# Altium PCB evacc_v3_1.PcbDoc (part 1 of 5)
Units mm, origin at the board's own origin, x right, y up, seen from the top; angles counter-clockwise.
Board outline 160 x 215 mm, 2 copper layers (Top Layer, Bottom Layer), stack 1.671 mm thick; 227 components, 143 nets, 622 pads, 320 vias.
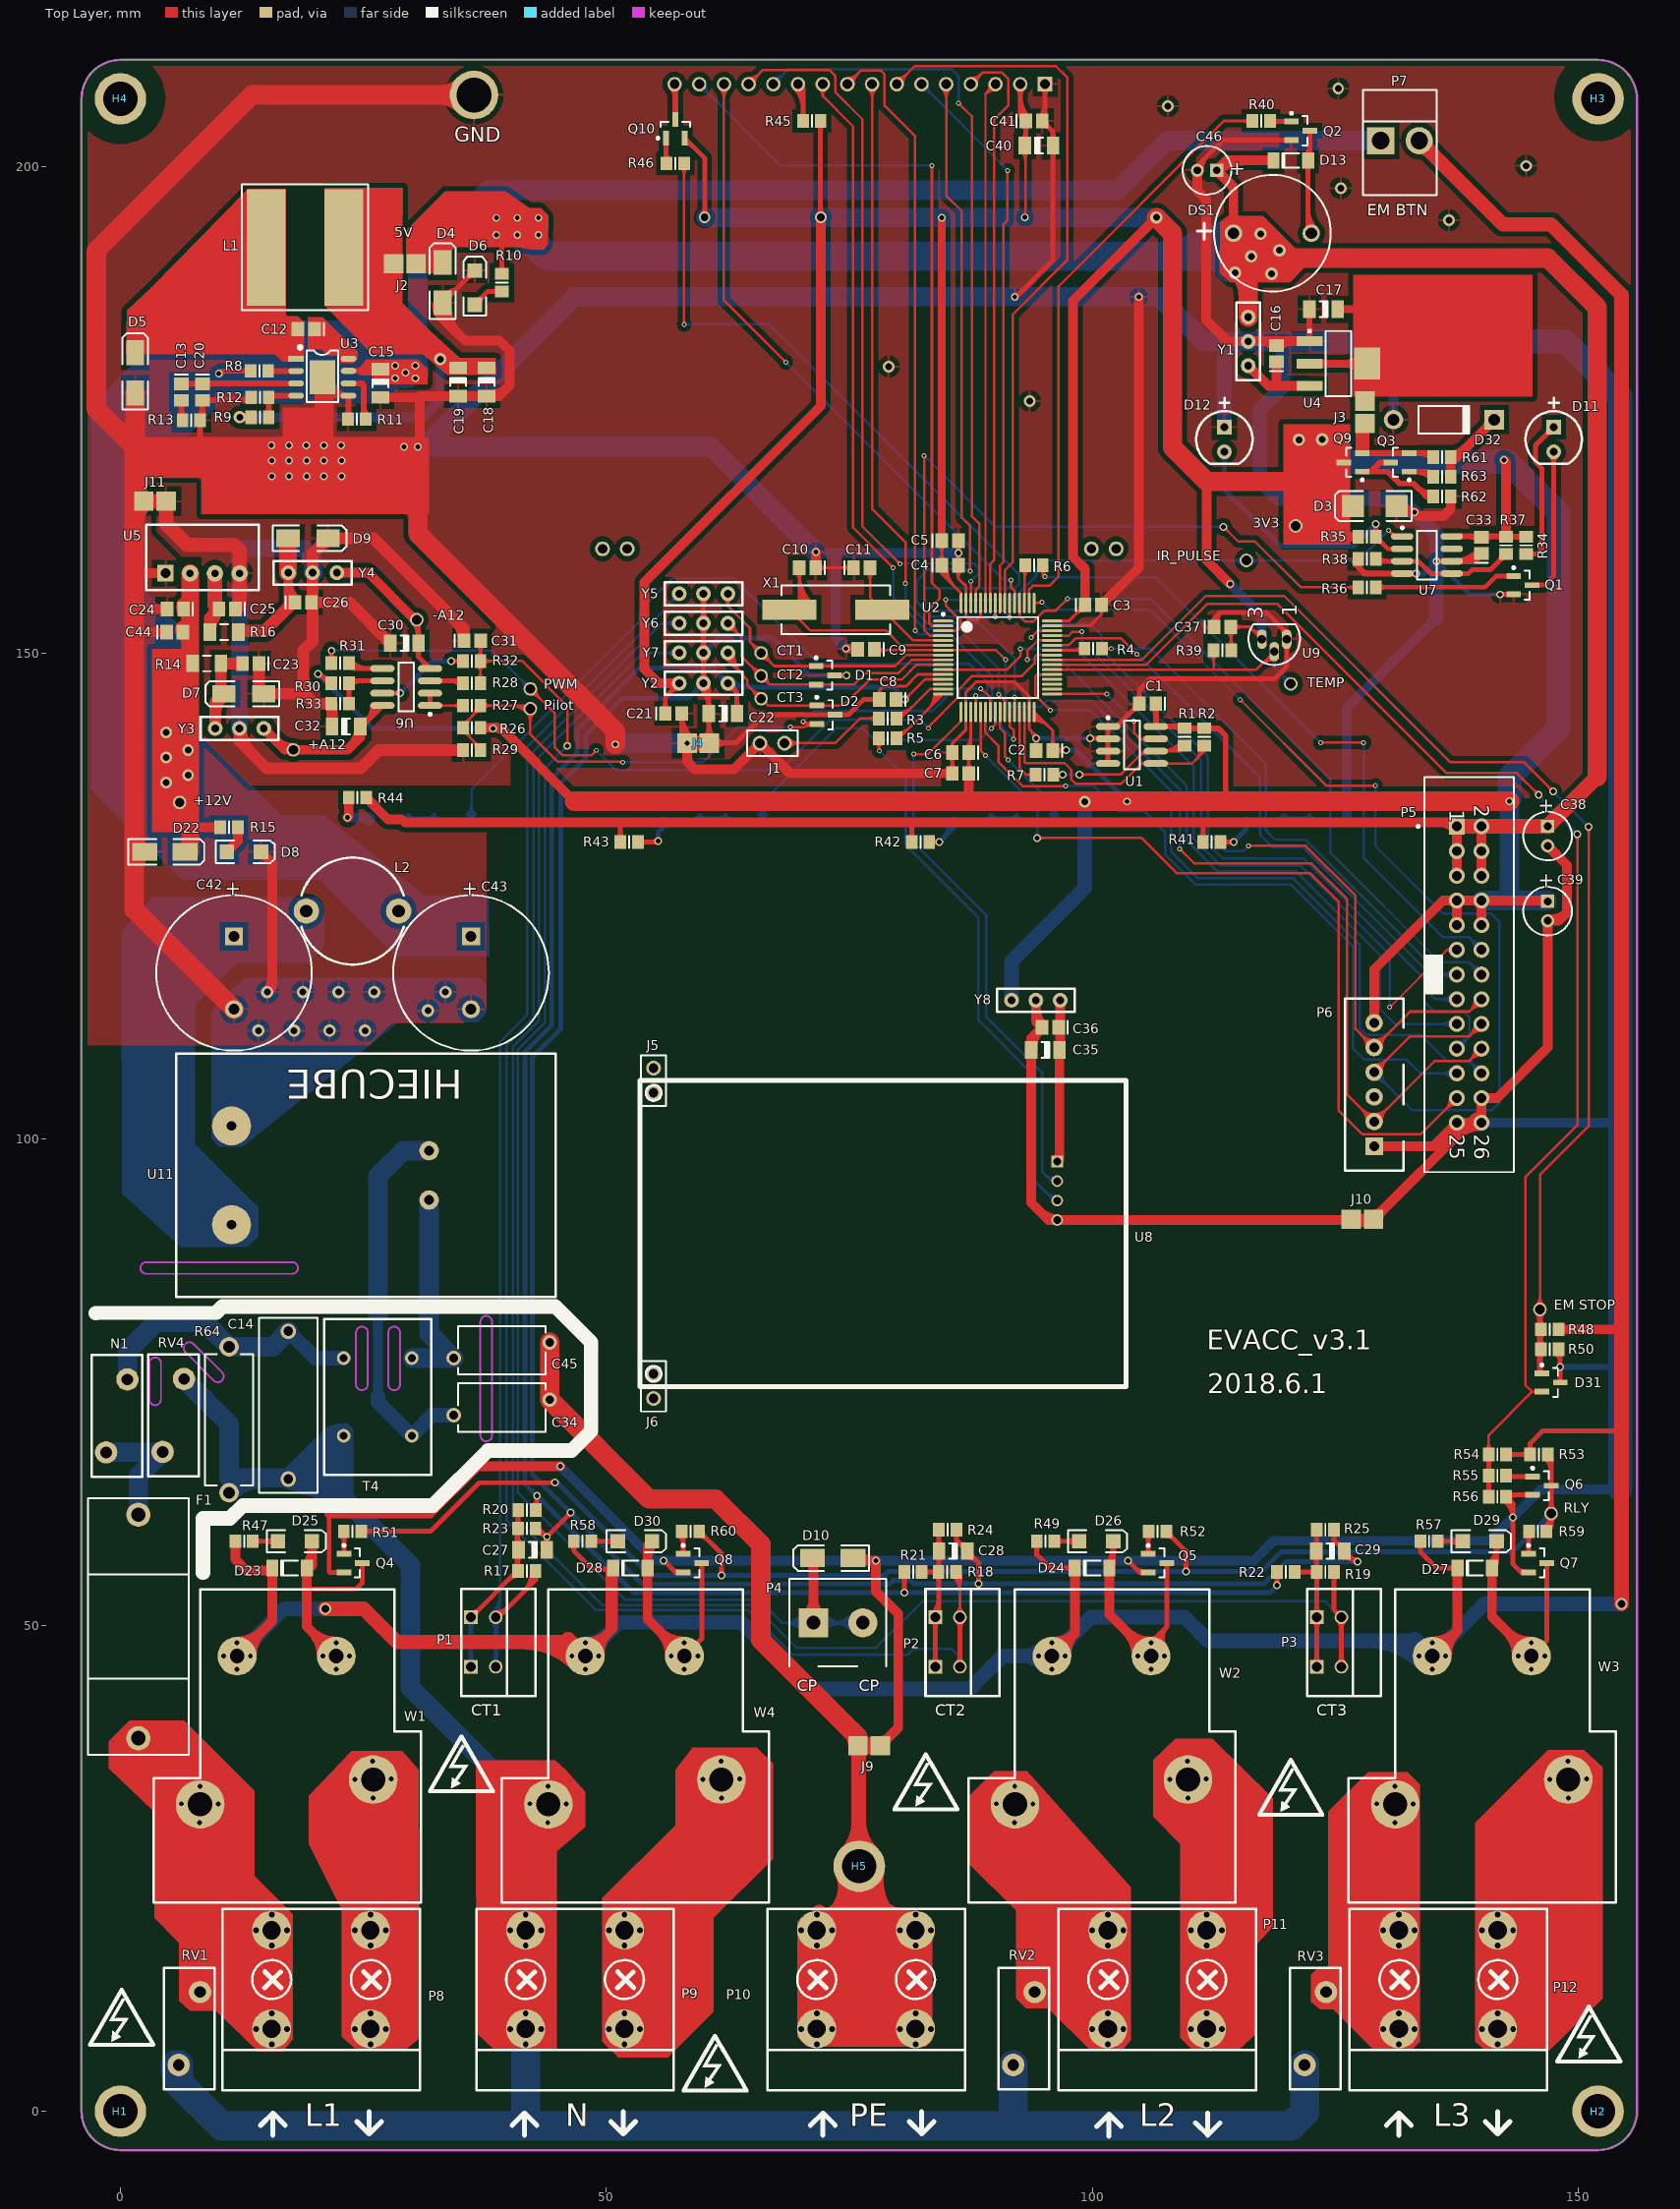
[diagram p0: Top Layer view]
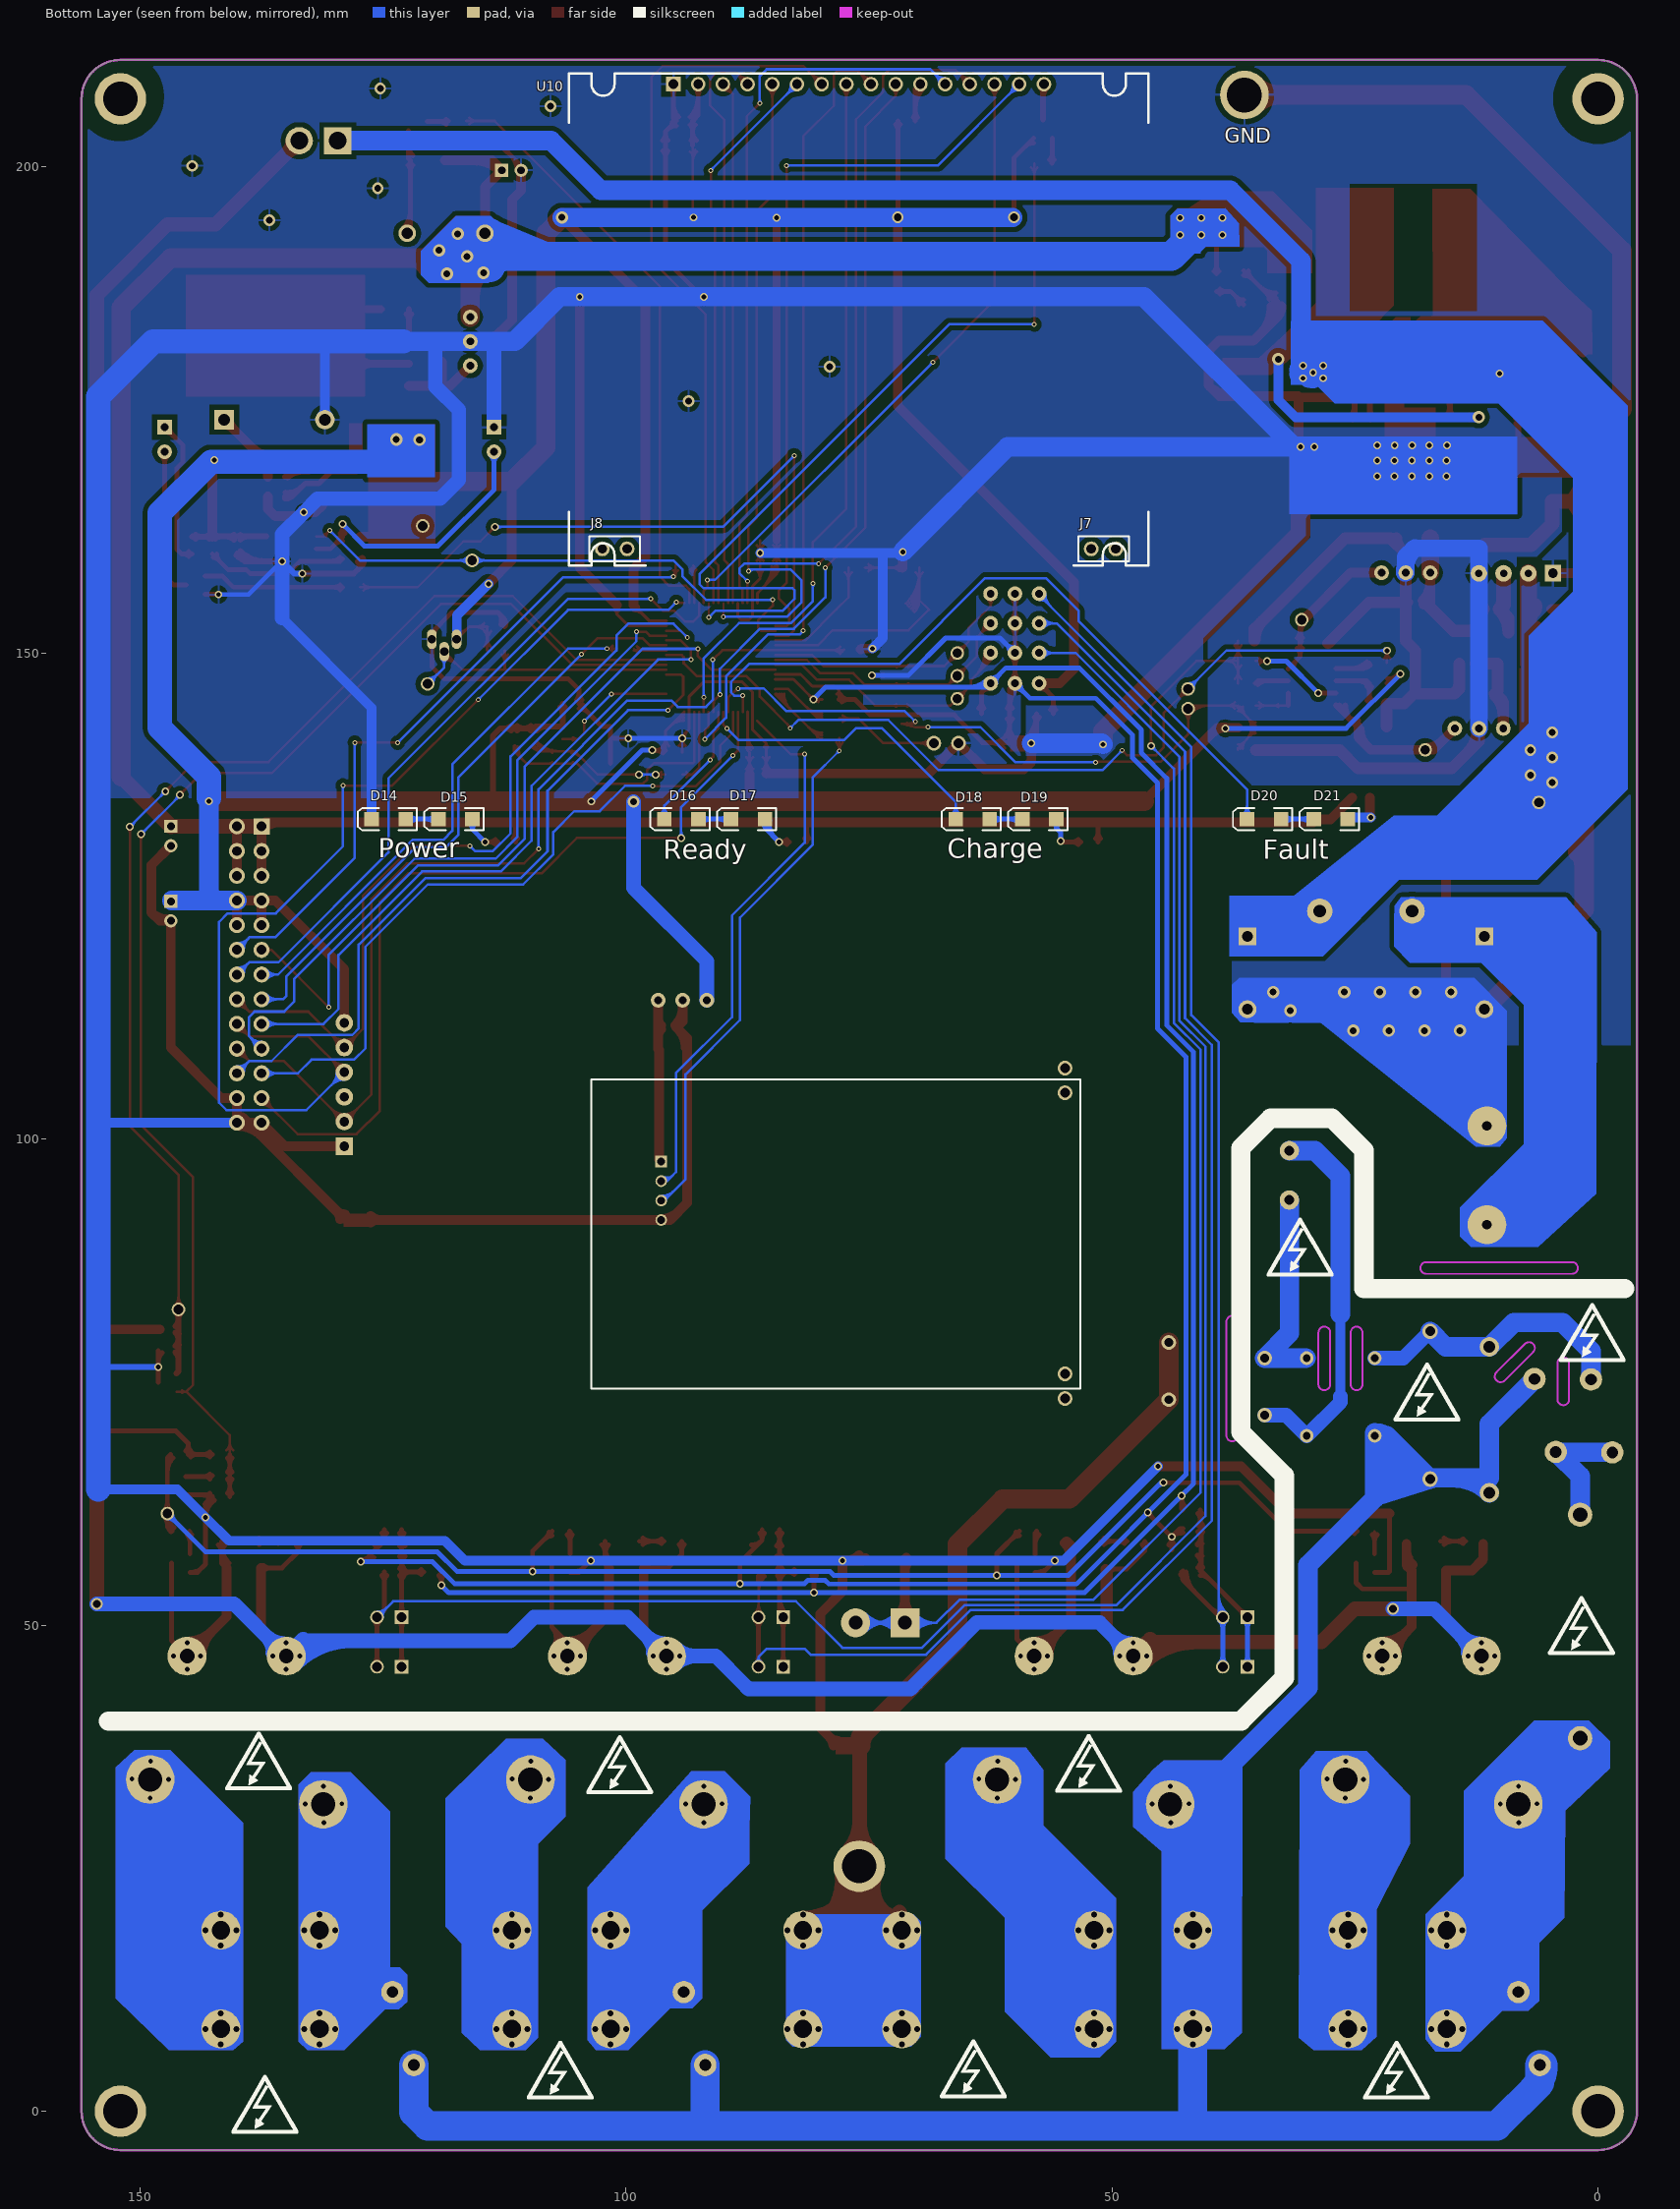
[diagram p1: Bottom Layer view, seen from below]

## Layer stack, top to bottom
Top Layer: signal copper 0.0356
Dielectric: core 1.6, FR-4, Dk 4.8
Bottom Layer: signal copper 0.0356

## Board outline
-4.002,0 ccw(c0,0) 0,-4.002 0,-4 152,-4 152,-4.002 ccw(c152,0) 156.002,0 155.999,0 155.999,207 156.002,207 ccw(c152,207) 152,211.002 0,211.002 ccw(c0,207) -4.002,207 -4,207

## Design rules (kind name [scope] priority, off if disabled: settings)
Clearance Clearance_Region [InPolygon and InNetClass('Power')] p1: gap=0.52
Clearance Clearance_All [All] p2: gap=0.2
Height [All] p1: minheight=0 maxheight=30 prefheight=25.4
HoleSize [All] p1: absolutevalues=TRUE maxlimit=6 minlimit=0.3 maxpercent=80.000 minpercent=20.000
MinimumSolderMaskSliver [All] p1: minsoldermaskwidth=0
PolygonConnect [All] p1: connectstyle=Relief reliefconductorwidth=0.254 reliefentries=4 polygonreliefangle="90 Angle"
RoomDefinition U_TempSensor [InComponentClass('U_TempSensor')] p1: confinementstyle=ConfineOut formatcopy=TRUE lockcomponents=TRUE outline 160.973,210.365 188.151,210.365 188.151,224.208 160.973,224.208
RoomDefinition U_Sockets [InComponentClass('U_Sockets')] p2: confinementstyle=ConfineOut formatcopy=TRUE lockcomponents=TRUE outline -49.085,146.382 -18.986,146.382 -18.986,159.844 -49.085,159.844
RoomDefinition U_RFID [InComponentClass('U_RFID')] p3: confinementstyle=ConfineOut formatcopy=TRUE lockcomponents=TRUE outline -48.45,76.253 -17.97,76.253 -17.97,90.604 -48.45,90.604
RoomDefinition U_Relays [InComponentClass('U_Relays')] p4: confinementstyle=ConfineOut formatcopy=TRUE lockcomponents=TRUE outline -48.958,94.185 -17.589,94.185 -17.589,109.298 -48.958,109.298
RoomDefinition U_Power2 [InComponentClass('U_Power2')] p5: confinementstyle=ConfineOut formatcopy=TRUE lockcomponents=TRUE outline -48.704,213.667 -18.986,213.667 -18.986,226.621 -48.704,226.621
RoomDefinition U_Power1 [InComponentClass('U_Power1')] p6: confinementstyle=ConfineOut formatcopy=TRUE lockcomponents=TRUE outline -48.704,195.531 -18.478,195.531 -18.478,209.755 -48.704,209.755
RoomDefinition U_Pilot [InComponentClass('U_Pilot')] p7: confinementstyle=ConfineOut formatcopy=TRUE lockcomponents=TRUE outline -48.958,111.33 -17.589,111.33 -17.589,127.332 -48.958,127.332
RoomDefinition U_MCU [InComponentClass('U_MCU')] p8: confinementstyle=ConfineOut formatcopy=TRUE lockcomponents=TRUE outline 160.866,178.361 188.659,178.361 188.659,191.696 160.866,191.696
RoomDefinition U_LCD_Direct [InComponentClass('U_LCD_Direct')] p9: confinementstyle=ConfineOut formatcopy=TRUE lockcomponents=TRUE outline -49.085,129.618 -18.351,129.618 -18.351,144.096 -49.085,144.096
RoomDefinition U_IR_BEAT [InComponentClass('U_IR_BEAT')] p10: confinementstyle=ConfineOut formatcopy=TRUE lockcomponents=TRUE outline 162.116,119.941 190.945,119.941 190.945,141.023 162.116,141.023
RoomDefinition U_EEP [InComponentClass('U_EEP')] p11: confinementstyle=ConfineOut formatcopy=TRUE lockcomponents=TRUE outline 160.719,193.88 184.341,193.88 184.341,203.024 160.719,203.024
RoomDefinition U_CT [InComponentClass('U_CT')] p12: confinementstyle=ConfineOut formatcopy=TRUE lockcomponents=TRUE outline 160.846,162.74 188.786,162.74 188.786,177.218 160.846,177.218
RoomDefinition U_Buzzor [InComponentClass('U_Buzzor')] p13: confinementstyle=ConfineOut formatcopy=TRUE lockcomponents=TRUE outline 160.973,143.69 188.786,143.69 188.786,160.073 160.973,160.073
RoomDefinition U_AC_DC [InComponentClass('U_AC_DC')] p14: confinementstyle=ConfineOut formatcopy=TRUE lockcomponents=TRUE outline -49.085,161.876 -16.827,161.876 -16.827,177.116 -49.085,177.116
RoomDefinition layout [InComponentClass('layout')] p15: confinementstyle=ConfineOut formatcopy=TRUE lockcomponents=TRUE outline -49.085,178.132 -16.573,178.132 -16.573,194.007 -49.085,194.007
RoutingVias [All] p1: holewidth=0.3 width=0.5 viastyle="Through Hole" minholewidth=0.3 minwidth=0.5 maxholewidth=0.711 maxwidth=1.27
SilkToSilkClearance [All] p1: silktosilkclearance=0.01
SilkscreenOverComponentPads [All] p1: minsilkscreentomaskgap=0.01
SolderMaskExpansion [All] p1: expansion=0.102
TestPointUsage [All] p1: valid=0 allowmultiple=FALSE
Testpoint [All] p1: side=15 testpointundercomponent=TRUE minsize=1.016 maxsize=2.54 preferedsize=1.524 minholesize=0 maxholesize=1.016 preferedholesize=0.813 testpointgrid=0.025 style=1023 order=0-112345678
Width [All] p1: maxlimit=5 minlimit=0.2 preferedwidth=0.254
19 further rules are at their usual default settings.

## Classes and differential pairs
component class layout: H1 H2 H3 H4 H5
component class U_Buzzor: C46 D13 DS1 Q2 R40
component class U_CT: C27 C28 C29 CT1 CT2 CT3 FL5 FL6 FL7 P1 P2 P3 R17 R18 R19 R20 R21 R22 R23 R24 R25 Y5 Y6 Y7
component class U_EEP: C1 R1 R2 U1
component class U_IR_BEAT: C33 D11 D12 IR_PULSE IR_PULSE1 Q1 R34 R35 R36 R37 R38 U7
component class U_LCD_Direct: C40 C41 D14 D15 D16 D17 D18 D19 D20 D21 J7 J8 Q10 R41 R42 R43 R44 R45 R46 U10
component class U_MCU: C2 C3 C4 C5 C6 C7 C8 C9 C10 C11 D1 D2 J1 R3 R4 R5 R6 R7 U2 X1
component class U_Pilot: C30 C31 C32 D10 P4 Pilot Pilot1 PWM PWM1 R26 R27 R28 R29 R30 R31 R32 R33 U6
component class U_Power1: +A1 +A12 -1 -A12 C23 C24 C25 C26 D7 D8 D9 FL3 FL4 J11 R14 R15 R16 U5 Y3 Y4
component class U_Power2: 3V3 C12 C13 C15 C16 C17 C18 C19 C20 C21 C22 D3 D4 D5 D6 D32 FL1 FL2 J2 J3 J4 L1 Q3 Q9 R8 R9 R10 R11 R12 R13 R61 R62 R63 U3 U4 Y1 Y2
component class U_RFID: C35 C36 J5 J6 J10 U8 Y8
component class U_Sockets: C38 C39 P5 P6
component class U_TempSensor: C37 R39 TEMP TEMP1 U9
component class U_AC_DC: +12V C14 C34 C42 C43 C44 C45 D22 F1 L2 N1 R64 RV4 T4 U11
component class U_Relays: D23 D24 D25 D26 D27 D28 D29 D30 D31 EM1 "EM STOP" J9 P7 P8 P9 P10 P11 P12 Q4 Q5 Q6 Q7 Q8 R47 R48 R49 R50 R51 R52 R53 R54 R55 R56 R57 R58 R59 R60 RLY RLY1 RV1 RV2 RV3 W1 W2 W3 W4
net class Power: +3V3 +5V +12V +A3V3 +A12V -A12V AGND EM12V GND GND-A12V

## Components (designator, comment, footprint, x,y, rotation, side; value= is the part's Value field where it differs from the comment)
3V3 "TP1.4/1.0" TP1.4/1.0 120.904,163.068 r90 top
+12V "TP1.4/1.0" TP1.4/1.0 6.096,134.62 r90 top (schematic designator 12V)
+A12 "TP1.4/1.0" TP1.4/1.0 17.78,140.03 r0 top
-A12 "TP1.4/1.0" TP1.4/1.0 30.48,153.416 r180 top
C1 "100nF 50V" CAPC2012N 105.664,144.78 r180 top
C2 "100nF 50V" CAPC2012N 95.06,139.967 r180 top
C3 "100nF 50V" CAPC2012N 100.076,154.94 r0 top
C4 "100nF 50V" CAPC2012N 85.344,159.004 r0 top
C5 "4.7uF 16V" CAPC2012N 85.344,161.544 r0 top
C6 "100nF 50V" CAPC2012N 86.424,139.764 r180 top
C7 "1uF 16V" CAPC2012N 86.424,137.605 r180 top
C8 "100nF 50V" CAPC2012N 78.931,145.225 r180 top
C9 "100nF 50V" CAPC2012N 76.708,150.368 r180 top
C10 "18pF 50V NP0" CAPC2012N 70.676,158.763 r180 top
C11 "18pF 50V NP0" CAPC2012N 76.264,158.763 r0 top
C12 "100nF 50V" CAPC2012N 19.114,183.314 r180 top
C13 "150pF 50V NP0" CAPC2012N 6.287,176.837 r270 top
C14 "0.1uF 275VAC MKP" "0.1uF 275VAC MKP" 17.272,72.624 r90 top
C15 "10uF 16V X7R" CAPC3216N 26.734,177.737 r270 top
C16 "4.7uF 16V" CAPC2012N 118.936,180.785 r90 top
C17 "10uF 16V X7R" CAPC3216N 123.762,185.346 r180 top
C18 "10uF 16V X7R" CAPC3216N 37.656,177.864 r270 top
C19 "10uF 16V X7R" CAPC3216N 34.735,177.864 r270 top
C20 "NC" CAPC2012N 8.446,176.837 r270 top
C21 "1uF 16V" CAPC2012N 56.896,143.764 r0 top
C22 "10uF 16V X7R" CAPC3216N 61.976,143.764 r180 top
C23 "100nF 50V" CAPC2012N 13.411,148.92 r180 top
C24 "4.7uF 16V" CAPC2012N 5.652,154.51 r180 top
C25 "4.7uF 16V" CAPC2012N 10.986,154.51 r180 top
C26 "100nF 50V" CAPC2012N 18.796,155.194 r0 top
C27 "10uF 16V X7R" CAPC3216N 42.406,57.736 r180 top
C28 "10uF 16V X7R" CAPC3216N 85.662,57.609 r180 top
C29 "10uF 16V X7R" CAPC3216N 124.46,57.609 r180 top
C30 "10uF 16V X7R" CAPC3216N 29.21,151.003 r180 top
C31 "270pF 50V NP0" CAPC2012N 36.195,151.257 r0 top
C32 "10uF 16V X7R" CAPC3216N 23.216,142.418 r0 top
C33 "100nF 50V" CAPC2012N 139.993,161.064 r90 top
C34 "222M 250VAC P10" CAPRD10-9x5 39.226,72.39 r0 top
C35 "10uF 16V X7R" CAPC3216N 95.148,109.169 r180 top
C36 "100nF 50V" CAPC2012N 95.656,111.481 r180 top
C37 "100nF 50V" CAPC2012N 113.36,152.679 r0 top
C38 "100uF 16V low ESR" CAPPR2-5x11 146.812,131.166 r270 top
C39 "100uF 16V low ESR" CAPPR2-5x11 146.812,123.444 r270 top
C40 "10uF 16V X7R" CAPC3216N 94.488,202.184 r0 top
C41 "100nF 50V X7R" CAPC2012N 93.98,204.724 r0 top
C42 "2200uF 25V low ESR" CAPPR7.5-16x25 11.684,117.094 r270 top locked
C43 "2200uF 25V low ESR" CAPPR7.5-16x25 36.068,117.094 r270 top locked
C44 "100nF 50V" CAPC2012N 5.588,152.146 r0 top
C45 "222M 250VAC P10" CAPRD10-9x5 39.226,78.27 r180 top
C46 "100uF 16V low ESR" CAPPR2-5x11 111.776,199.644 r180 top
CT1 "TP1.4/1.0" TP1.4/1.0 65.913,149.987 r180 top
CT2 "TP1.4/1.0" TP1.4/1.0 65.913,147.637 r90 top
CT3 "TP1.4/1.0" TP1.4/1.0 65.913,145.288 r270 top
D1 "MMBZ5V6ALT1G" SOT23-3N 72.517,147.701 r0 top
D2 "MMBZ5V6ALT1G" SOT23-3N 72.583,143.637 r0 top
D3 "SMBJ3.3A" DSO-C2/X2.3 129.032,165.1 r180 top
D4 "SMAJ5.0A" DSO-C2/G1.6 33.147,188.087 r90 top
D5 "B340A-13-F" DSO-C2/G1.6 1.524,178.816 r90 top
D6 "LED2" 3.2X1.6X1.1 36.449,187.579 r90 top
D7 "1SMA5927BT3G" DSO-C2/X1.8 12.7,145.796 r180 top
D8 "LED2" 3.2X1.6X1.1 12.7,129.54 r0 top
D9 "1SMA5927BT3G" DSO-C2/X1.8 19.304,161.798 r0 top
D10 "SMAJ13CA" DSO-C2/G1.6 73.279,56.896 r180 top
D11 "IR333/H0" LED5.08/2.54-2 147.447,171.958 r180 top
D12 "PT334-6B" LED5.08/2.54-2 113.563,171.958 r180 top
D13 "LL4148" MELF-D3513-1405 120.396,200.66 r180 top
D14 "LED2" 3.2X1.6X1.1 124.397,132.906 r0 bottom locked
D15 "LED2" 3.2X1.6X1.1 117.539,132.906 r0 bottom locked
D16 "LED2" 3.2X1.6X1.1 94.298,132.906 r0 bottom locked
D17 "LED2" 3.2X1.6X1.1 87.44,132.906 r0 bottom locked
D18 "LED2" 3.2X1.6X1.1 64.326,132.906 r0 bottom locked
D19 "LED2" 3.2X1.6X1.1 57.468,132.906 r0 bottom locked
D20 "LED2" 3.2X1.6X1.1 34.354,132.906 r0 bottom locked
D21 "LED2" 3.2X1.6X1.1 27.496,132.906 r0 bottom locked
D22 "SMAJ13A" DSO-C2/G1.6 4.572,129.54 r0 top
D23 "LL4148" MELF-D3513-1405 17.399,55.88 r180 top
D24 "LL4148" MELF-D3513-1405 99.949,55.88 r180 top
D25 "LED2" 3.2X1.6X1.1 17.951,58.625 r0 top
D26 "LED2" 3.2X1.6X1.1 100.374,58.625 r0 top
D27 "LL4148" MELF-D3513-1405 139.319,55.88 r180 top
D28 "LL4148" MELF-D3513-1405 52.451,55.88 r180 top
D29 "LED2" 3.2X1.6X1.1 139.827,58.625 r0 top
D30 "LED2" 3.2X1.6X1.1 52.927,58.625 r0 top
D31 "MMBZ5V6ALT1G" SOT23-3N 147.168,74.955 r0 top
D32 "1N4729A" DIO10.36-5.2x2.8 136.144,173.99 r0 top
DS1 "B12A05" BZ12/10mm 118.502,193.167 r0 top
"EM STOP" "TP1.4/1.0" TP1.4/1.0 146.025,82.474 r0 top (schematic designator EM)
F1 "2A 250V" FUSE-CASE-23mm 1.842,49.862 r90 top
H1 "M3.0" SCREW_HOLE_3.5#1 0,15 r0 top locked
H2 "M3.0" SCREW_HOLE_3.5#1 152,15 r0 top locked
H3 "M3.0" SCREW_HOLE_3.5#2 152,207 r0 top locked
H4 "M3.0" SCREW_HOLE_3.5#2 0,207 r0 top locked
H5 "M3.0" SCREW_HOLE_3.5#3 76,29.268 r0 top locked
IR_PULSE "IR PULSE" TP1.4/1.0 115.824,159.512 r90 top
J1 "P2.54-2" JP2-P2.54 67.056,140.716 r180 top
J2 "JUMPER1X2" JP-SOLDER-H1X2-3X2 29.274,190.045 r0 top
J3 "JUMPER1X2" JP-SOLDER-H1X2-3X2 128.016,174.752 r270 top
J4 "JUMPER1X2" JP-SOLDER-H1X2-3X2 59.436,140.716 r0 top
J5 "P2.54-2" JP2-P2.54 54.839,106.02 r90 top
J6 "P2.54-2" JP2-P2.54 54.839,74.574 r270 top
J7 "P2.54-2" JP2-P2.54 50.864,160.708 r0 bottom
J8 "P2.54-2" JP2-P2.54 101.156,160.708 r0 bottom
J9 "JUMPER1X2" JP-SOLDER-H1X2-3X2 77.013,37.592 r180 top
J10 "JUMPER1X2" JP-SOLDER-H1X2-3X2 127.762,91.745 r0 top
J11 "JUMPER1X2" JP-SOLDER-H1X2-3X2 3.556,165.608 r180 top
L1 "15uH 12x12" IN-12.2X12.2MM 18.987,191.707 r0 top
L2 "5uH" Inductor9.5-11x21 23.876,123.444 r0 top locked
N1 "NTC-10D11" 10D431K -1.473,67.767 r90 top
P1 "KF141V-2P" KF141V-2P 35.077,42.672 r0 top
P2 "KF141V-2P" KF141V-2P 82.829,42.672 r0 top
P3 "KF141V-2P" KF141V-2P 122.072,42.672 r0 top
P4 "KF128-5.08-2P" KF128-5.08-2P 71.291,50.243 r0 top
P5 "IDC2.54-V26D" IDC2.54-V26D 138.748,116.918 r270 top locked
P6 "XH2.54-6" REAL_SIP6_2.54 128.969,105.601 r90 top
P7 "CON2-3.96" CON2/3.96mm 129.644,202.692 r0 top
P8 "KF135-2-10.16" KF135-2-10.16 20.638,13.54 r0 top locked
P9 "KF135-2-10.16" KF135-2-10.16 46.768,13.54 r0 top locked
P10 "KF135-2-10.16" KF135-2-10.16 76.709,13.54 r0 top locked
P11 "KF135-2-10.16" KF135-2-10.16 106.649,13.54 r0 top locked
P12 "KF135-2-10.16" KF135-2-10.16 136.589,13.54 r0 top locked
Pilot "TP1.4/1.0" TP1.4/1.0 42.164,144.272 r90 top
PWM "TP1.4/1.0" TP1.4/1.0 42.164,146.304 r0 top
Q1 "MMBT2222ALT1" SOT23-3N 144.272,156.972 r0 top
Q2 "MMBT2222ALT1" SOT23-3N 121.412,203.708 r0 top
Q3 "MMBT2907ALT" SOT23-3N 131.623,169.596 r180 top
Q4 "MMBT2222ALT1" SOT23-3N 23.942,56.388 r0 top
Q5 "MMBT2222ALT1" SOT23-3N 106.68,56.388 r0 top
Q6 "MMBT2222ALT1" SOT23-3N 146.221,64.34 r0 top
Q7 "MMBT2222ALT1" SOT23-3N 145.796,56.388 r0 top
Q8 "MMBT2222ALT1" SOT23-3N 58.845,56.388 r0 top
Q9 "FDN360P" SOT23-3N 126.797,169.596 r180 top
Q10 "MMBT2907ALT" SOT23-3N 57.087,203.913 r90 top
R1 "4k22 1%" RESC2012N 109.474,141.351 r90 top
R2 "4k22 1%" RESC2012N 111.506,141.351 r90 top
R3 "100R 5%" RESC2012N 78.931,143.256 r180 top
R4 "27R 5%" RESC2012N 100.076,150.444 r180 top
R5 "27R 5%" RESC2012N 78.931,141.224 r0 top
R6 "27R 5%" RESC2012N 93.98,159.004 r0 top
R7 "27R 5%" RESC2012N 95.06,137.478 r180 top
R8 "100k 1%" RESC2012N 14.288,179.007 r180 top
R9 "210k 1%" RESC2012N 14.351,174.244 r0 top
R10 "4k22 1%" RESC2012N 39.243,188.087 r90 top
R11 "100k 1%" RESC2012N 24.321,174.054 r0 top
R12 "40k2 1%" RESC2012N 14.351,176.276 r180 top
R13 "100k 1%" RESC2012N 7.303,173.916 r180 top
R14 "27R" RESC3216N 8.89,148.92 r0 top
R15 "4k22 1%" RESC2012N 11.176,132.08 r0 top
R16 "27R" RESC3216N 10.668,152.146 r0 top
R17 "50R 1%" RESC2012N 41.806,55.577 r0 top
R18 "50R 1%" RESC2012N 85.062,55.45 r0 top
R19 "50R 1%" RESC2012N 123.952,55.45 r0 top
R20 "10k 1%" RESC2012N 41.834,61.849 r0 top
R21 "10k 1%" RESC2012N 81.534,55.45 r180 top
R22 "10k 1%" RESC2012N 119.888,55.45 r180 top
R23 "10k 1%" RESC2012N 41.806,59.944 r180 top
R24 "10k 1%" RESC2012N 85.09,59.817 r180 top
R25 "10k 1%" RESC2012N 123.952,59.817 r180 top
R26 "2k94 1%" RESC2012N 36.131,142.303 r0 top
R27 "15k 1%" RESC2012N 36.131,144.589 r0 top
R28 "1k 1%" RESC2012N 36.131,146.875 r0 top
R29 "4k22 1%" RESC2012N 36.131,140.017 r0 top
R30 "15k 1%" RESC2012N 22.606,146.875 r0 top
R31 "15k 1%" RESC2012N 22.606,148.971 r0 top
R32 "1k 1%" RESC2012N 36.131,149.161 r0 top
R33 "15k 1%" RESC2012N 22.606,144.78 r180 top
R34 "100R" RESC2012N 144.602,161.064 r90 top
R35 "470k 1%" RESC2012N 128.245,161.95 r180 top
R36 "1k 1%" RESC2012N 128.245,156.743 r0 top
R37 "10k 1%" RESC2012N 142.533,161.064 r270 top
R38 "10k 1%" RESC2012N 128.245,159.69 r0 top
R39 "3k3 1%" RESC2012N 113.36,150.266 r0 top
R40 "1k 1%" RESC2012N 117.348,204.724 r180 top
R41 "330R 5%" RESC2012N 112.268,130.556 r0 top
R42 "330R 5%" RESC2012N 82.296,130.556 r0 top
R43 "330R 5%" RESC2012N 52.324,130.556 r0 top
R44 "330R 5%" RESC2012N 24.384,135.128 r180 top
R45 "10k 1%" RESC2012N 71.12,204.724 r0 top
R46 "1k 1%" RESC2012N 57.087,200.357 r180 top
R47 "10k 1%" RESC2012N 12.719,58.625 r180 top
R48 "10k 1%" RESC2012N 147.041,80.416 r0 top
R49 "10k 1%" RESC2012N 95.167,58.625 r180 top
R50 "2k94 1%" RESC2012N 147.041,78.384 r0 top
R51 "1k 1%" RESC2012N 23.876,59.641 r0 top
R52 "1k 1%" RESC2012N 106.68,59.641 r0 top
R53 "2k94 1%" RESC2012N 145.923,67.564 r0 top
R54 "4k22 1%" RESC2012N 141.649,67.564 r0 top
R55 "1k 1%" RESC2012N 141.649,65.389 r0 top
R56 "2k94 1%" RESC2012N 141.649,63.213 r0 top
R57 "10k 1%" RESC2012N 134.62,58.625 r180 top
R58 "10k 1%" RESC2012N 47.542,58.625 r180 top
R59 "1k 1%" RESC2012N 145.796,59.641 r0 top
R60 "1k 1%" RESC2012N 58.642,59.641 r0 top
R61 "100 1%" RESC2012N 135.941,170.155 r180 top
R62 "4k7 1%" RESC2012N 135.941,166.091 r180 top
R63 "1k 1%" RESC2012N 135.941,168.123 r0 top
R64 "1M 1W" RES15-13.5X5 11.176,71.12 r270 top
RLY "TP1.4/1.0" TP1.4/1.0 147.171,61.468 r90 top
RV1 "10D431K" 10D431K 8.192,12.256 r270 top
RV2 "10D431K" 10D431K 94.044,12.256 r270 top
RV3 "10D431K" 10D431K 124.016,12.256 r270 top
RV4 "10D431K" 10D431K 4.343,67.818 r90 top
T4 "UU9.8/UF9.8 20mH" UU9.8/UF9.8 26.472,73.47 r0 top
TEMP "TP1.4/1.0" TP1.4/1.0 120.396,146.812 r90 top
U1 "M24C64-WMN6" SO8_M 104.05,140.526 r0 top
U2 "STM32F105RB" TQFP64_M 90.234,149.532 r0 top locked
U3 "MP1584" SOIC8E 20.765,178.361 r0 top
U4 "LD1117S33CTR" SOT223-4M 125.286,179.758 r0 top
U5 "B1212S-1W" B0505S-W1 4.636,158.193 r0 top
U6 "LM7332MA" D008_M 29.4,146.494 r180 top
U7 "LM293D" SOP8_M 134.405,160.073 r0 top
U8 "M1 module" RFID_MOD 103.458,106.049 r180 top
U9 "DS18B20" "TO92 variant" 118.694,151.409 r90 top
U10 "LM6029ACW" LM6029A 105.855,209.603 r180 bottom locked
U11 "HA12N20-2539" HIECUBE_AC_DC_24W 31.75,98.806 r180 top locked
W1 "HF165FD-G/12-HY1" HF165FD-G/12-HY1 12.002,46.814 r180 top locked
W2 "HF165FD-G/12-HY1" HF165FD-G/12-HY1 95.822,46.814 r180 top locked
W3 "HF165FD-G/12-HY1" HF165FD-G/12-HY1 134.938,46.814 r180 top locked
W4 "HF165FD-G/12-HY1" HF165FD-G/12-HY1 47.816,46.814 r180 top locked
X1 "25MHz" ATSM-49 73.597,154.445 r0 top
Y1 "DSS6NZ82A103" DSS6 116.015,182.044 r270 top
Y2 "DSS6NZ82A103" DSS6 59.983,146.876 r0 top
Y3 "DSS6NZ82A103" DSS6 12.243,142.24 r0 top
Y4 "DSS6NZ82A103" DSS6 19.772,158.242 r180 top
Y5 "DSS6NZ82A103" DSS6 59.983,156.096 r0 top
Y6 "DSS6NZ82A103" DSS6 59.983,153.048 r0 top
Y7 "DSS6NZ82A103" DSS6 59.983,150 r0 top
Y8 "DSS6NZ82A103" DSS6 94.172,114.275 r0 top

## Footprints (in the part's own frame and the unit in brackets; to place one, negate y for a bottom-side part, rotate by r counter-clockwise, add the part's x,y. Pads: shape width x height; smd on the part's side, far side on the other; paste and mask are expansions set on the pad)
"0.1uF 275VAC MKP" [mm] "MKP Capactor 18x6"
  round 1.6 hole 1: 1(-7.6,0) 2(7.6,0)
  silkscreen extent -9,-3 9,3
3.2X1.6X1.1 [mm] "SMT LED; 2 Flat Leads"
  rect 1.5x1.5 smd: 1(-1.75,0) 2(1.75,0)
  silkscreen extent -2.9,-1.15 3.2,1.15
10D431K [mm] "Varistor 275VAC dia.12.5 P7.5"
  round 2.3 hole 1.2: 1(0,0) 2(7.5,-2.2)
  silkscreen extent -2.5,-3.7 10,1.5
ATSM-49 [mm]
  rect 5.55x2.05 smd: 1(-4.775,0) 2(4.775,0)
  silkscreen extent -5.6,-2.5 5.6,2.5, body extent -5.6,-2.51 5.6,2.51, height 4
B0505S-W1 [mm] "DC-DC converter for RS485"
  rect 1.7x1.7 hole 1: 1(0,0)
  round 1.7 hole 0.762: 2(2.54,0) 3(5.08,0) 4(7.62,0)
  silkscreen extent -2,-1.73 9.62,5, body extent -2,-1.73 9.62,5, height 10
BZ12/10mm [mm]
  round 1.8 hole 1.2: 1(-4,0) 2(4,0)
  silkscreen extent -7.72,-6 6,6, body extent -6.01,-6.01 6.01,6.01, height 10.1
CAPC2012N [mm] "Chip Capacitor, Body 2.0x1.3mm, IPC Medium Density"
  rect 1.3x1.5 smd: 1(-0.85,0) 2(0.85,0)
  silkscreen extent -1.8,-0.65 -1.8,0.65, body extent -1.1,-0.72 1.1,0.72, height 1.1
CAPC3216N [mm] "Chip Capacitor, Body 3.2x1.6mm, IPC Medium Density"
  rect 1.3x1.8 smd: 1(-1.45,0) 2(1.45,0)
  silkscreen extent -0.4,-0.8 0.4,0.8, body extent -1.7,-0.9 1.7,0.9, height 1.35
CAPPR2-5x11 [mm] "Capacitor, Electrolytic, Radial; Body 5 x 11 mm (Dia.xH typ); Pin Spacing 2 mm (typ)"
  rect 1.35x1.35 hole 0.8: 1(-1,0)
  round 1.35 hole 0.8: 2(1,0)
  silkscreen extent -2.5,-2.5 2.5,2.5
CAPPR7.5-16x25 [mm] "Capacitor, Electrolytic, Radial; Body 16 x 25 mm (Dia.xH typ); Pin Spacing 7.5 mm (typ)"
  rect 1.85x1.85 hole 1.1: 1(-3.75,0)
  round 1.85 hole 1.1: 2(3.75,0)
  silkscreen extent -8,-8 8,8
CAPRD10-9x5 [mm] "Capacitor, Ceramic, Thru-Hole, Disc; Body 9 x 5 mm (LxW max) Pin Spacing 10 mm (typ)"
  round 1.5 hole 0.9: 1(-4.936,-0.8) 2(4.936,0.8)
  silkscreen extent -4.5,-2.5 4.5,2.5
CON2/3.96mm [mm]
  rect 2.8x2.8 hole 1.8: 1(0,0)
  round 2.8 hole 1.8: 2(3.96,0)
  silkscreen extent -1.8,-5.6 5.76,5.2
D008_M [mm] "SOIC, 8-Leads, Body 4.9x3.9mm, Pitch 1.27mm, IPC Low Density"
  oval 2.5x0.7 smd: 1(-2.45,1.905) 2(-2.45,0.635) 3(-2.45,-0.635) 4(-2.45,-1.905) 5(2.45,-1.905) 6(2.45,-0.635) 7(2.45,0.635) 8(2.45,1.905)
  silkscreen extent -2.58,-2.5 0.8,2.93, body extent -2,-2.5 2,2.5, height 1.75
DIO10.36-5.2x2.8 [mm] "Diode, Axial; Body 5.2 x 2.7 mm (LxDia. max), Lead Dia. 0.86 mm (max)"
  round 2 hole 1.2: 1(-5.18,0)
  rect 2x2 hole 1.2: 2(5.18,0)
  silkscreen extent -2.6,-1.4 2.7,1.4
DSO-C2/G1.6 [mm] "DO-214-AC/SMA; 2 C-Bend Leads; Body 5.3 x 2.6 mm, inc. leads (LxW)"
  rect 2.55x1.85 smd: 1(-2.075,0) 2(2.075,0)
  silkscreen extent -3.75,-1.33 4.05,1.33
DSO-C2/X1.8 [mm] "DO-214-AC/SMA; 2 C-Bend Leads; Body 5 x 2.7 mm, inc. leads (LxW)"
  rect 2.4x1.8 smd: 1(-2.05,0) 2(2.05,0)
  silkscreen extent -3.65,-1.3 3.95,1.3
DSO-C2/X2.3 [mm] "DO-214-AA/SMB; 2 C-Bend Leads; Body 5.3 x 3.6 mm, inc. leads (LxW)"
  rect 2.3x2.3 smd: 1(-2.25,0) 2(2.25,0)
  silkscreen extent -3.8,-1.55 4.1,1.55
DSS6 [mil] "Murata EMI supression filter"
  round 60 hole 31.5: 1(-98.42,0) 2(0,0) 3(98.43,0)
  silkscreen extent -157,-47 157,47, body extent -157,-47 157,47, height 276
FUSE-CASE-23mm [mm]
  round 2.5 hole 1.5: 1(-11.5,0) 2(11.5,0)
  silkscreen extent -13.2,-5.2 13.2,5.2
HF165FD-G/12-HY1 [mm]
  round 4 hole 1.5: 1(0,0) 2(-10.2,0)
  round 5 hole 2.5: 4(-14,12.7) 5(3.8,15.24)
  silkscreen extent -18.9,-6.86 8.6,25.34, body extent -18.96,-6.92 8.78,25.47, height 20.4
HIECUBE_AC_DC_24W [mm]
  round 2 hole 1: 1(0,0) 2(0,5.08)
  round 4 hole 1: 3(20.32,7.62) 4(20.32,-2.54)
  silkscreen extent -13,-9.96 26,15.04, body extent -13.13,-10.11 25.98,15.19, height 22
IDC2.54-V26D [mm] "Connector; IDC, Low Profile Male Header, Thru-Hole; 26 Position; Vertical; Pitch 2.54 mm; Body 40.64 x 9.2 x 9.45 mm (LxWxH)"
  rect 1.65x1.65 hole 1: 1(-15.24,-1.27)
  round 1.65 hole 1: 2(-15.24,1.27) 3(-12.7,-1.27) 4(-12.7,1.27) 5(-10.16,-1.27) 6(-10.16,1.27) 7(-7.62,-1.27) 8(-7.62,1.27) 9(-5.08,-1.27) 10(-5.08,1.27) 11(-2.54,-1.27) 12(-2.54,1.27) 13(0,-1.27) 14(0,1.27) 15(2.54,-1.27) 16(2.54,1.27) 17(5.08,-1.27) 18(5.08,1.27) 19(7.62,-1.27) 20(7.62,1.27) 21(10.16,-1.27) 22(10.16,1.27) 23(12.7,-1.27) 24(12.7,1.27) 25(15.24,-1.27) 26(15.24,1.27)
  silkscreen extent -20.32,-5.37 20.32,4.6, body extent -20.32,-4.6 20.32,4.6, height 9.45
IN-12.2X12.2MM [mm]
  rect 4x12 smd: 1(-4,0) 2(4,0)
  silkscreen extent -6.5,-6.45 6.5,6.5
Inductor9.5-11x21 [mm] "Radial type inductor"
  round 2.6 hole 1.3: 1(-4.75,0) 2(4.75,0)
  silkscreen extent -5.26,-5.5 5.26,5.5, body extent -5.46,-5.49 5.5,5.49, height 21.1
JP2-P2.54 [mil] "2-pin jumper P2.54"
  round 60 hole 39.37: 1(-50,0) 2(50,0)
  silkscreen extent -102,-51 102,51, body extent -100,-50 100,50, height 319
JP-SOLDER-H1X2-3X2 [mm]
  rect 2x2 smd: 1(-1.15,0) 2(1.15,0)
KF128-5.08-2P [mm]
  rect 3x3 hole 1.4: 1(0,0)
  round 3 hole 1.4: 2(5.08,0)
  silkscreen extent -2.5,-4.5 7.5,4.5, body extent -2.49,-4.52 7.52,4.47, height 14
KF135-2-10.16 [mm]
  round 4 hole 1.9: 1(-5.08,-5.08) 1(-5.08,5.08) 2(5.08,-5.08) 2(5.08,5.08)
  silkscreen extent -10.16,-11.4 10.16,7.25, body extent -10.29,-11.4 10.16,7.32, height 29.5
KF141V-2P [mm] "screwless connector 2 pins"
  rect 1.4x1.4 hole 1: 1(0.991,3.048) 1(0.991,8.128)
  round 1.4 hole 1: 2(3.531,3.048) 2(3.531,8.128)
  silkscreen extent -0.01,0.05 7.61,11.05, body extent -0.03,0.05 7.65,11.02, height 13.8
LED5.08/2.54-2 [mm]
  rect 1.5x1.5 hole 0.8: 1(0,-1.27)
  round 1.5 hole 0.8: 2(0,1.27)
  silkscreen extent -2.9,-4.27 2.9,2.51, body extent -2.95,-3.15 2.95,2.75, height 9.69
LM6029A [mm] "LCD module"
  rect 1.5x1.5 hole 1: 1(10.75,-1.1)
  round 1.5 hole 1: 2(13.29,-1.1) 3(15.83,-1.1) 4(18.37,-1.1) 5(20.91,-1.1) 6(23.45,-1.1) 7(25.99,-1.1) 8(28.53,-1.1) 9(31.07,-1.1) 10(33.61,-1.1) 11(36.15,-1.1) 12(38.69,-1.1) 13(41.23,-1.1) 14(43.77,-1.1) 15(46.31,-1.1) 16(48.85,-1.1)
  silkscreen extent 0,-50.6 59.6,0, body extent 0,-50.6 59.6,0, height 8.24
MELF-D3513-1405 [mm] "Metal Electrode Face (MELF) Diode; Body 3.5 x 1.6 mm (LxDia)"
  rect 1.25x1.7 smd: 1(-1.775,0) 2(1.775,0)
  silkscreen extent -0.85,-0.75 0.85,0.75
REAL_SIP6_2.54 [mm]
  rect 1.8x1.8 hole 1: 1(-6.35,0)
  round 1.8 hole 1: 2(-3.81,0) 3(-1.27,0) 4(1.27,0) 5(3.81,0) 6(6.35,0)
  silkscreen extent -8.85,-3 8.85,3, body extent -8.76,-2.92 8.84,2.88, height 7
RES15-13.5X5 [mm] "Resistor, Axial; Body 13.5 x 5 mm (LxDia. max), Lead Dia. 0.85 mm (max)"
  round 2 hole 1.2: 1(-7.5,0) 2(7.5,0)
  silkscreen extent -6.75,-2.5 6.75,2.5
RESC2012N [mm] "Chip Resistor, Body 2.0x1.3mm, IPC Medium Density"
  rect 1.2x1.4 smd: 1(-0.9,0) 2(0.9,0)
  silkscreen extent 0,-0.6 0,0.6, body extent -1.07,-0.7 1.07,0.7, height 0.65
RESC3216N [mm] "Chip Resistor, Body 3.2x1.6mm, IPC Medium Density"
  rect 1.3x1.8 smd: 1(-1.45,0) 2(1.45,0)
  silkscreen extent -0.4,-0.8 0.4,0.8, body extent -1.68,-0.87 1.68,0.87, height 0.71
RFID_MOD [mm] "M1 RFID module"
  rect 1.2x1.2 hole 0.8: 1(7.09,8.38)
  round 1.2 hole 0.8: 2(7.09,10.38) 3(7.09,12.38) 4(7.09,14.38)
  silkscreen extent 0,0 50,31.5, body extent -0.1,-0.23 50.22,31.62, height 4
SCREW_HOLE_3.5#1 [mm]
  round 5.3 hole 3.5: 0(0,-15)
SCREW_HOLE_3.5#2 [mm]
  round 5.3 hole 3.5: 0(0,0)
SCREW_HOLE_3.5#3 [mm]
  round 5.3 hole 3.5: 0(0,-4.068)
SO8_M [mm] "8-Pin Small Outline Integrated Circuit 1.27 mm Pitch, IPC Low Density"
  oval 2.5x0.7 smd: 1(-2.45,1.905) 2(-2.45,0.635) 3(-2.45,-0.635) 4(-2.45,-1.905) 5(2.45,-1.905) 6(2.45,-0.635) 7(2.45,0.635) 8(2.45,1.905)
  silkscreen extent -2.57,-2.5 0.8,2.93, body extent -2,-2.5 2,2.5, height 1.75
SOIC8E [mm]
  rect 2.62x3.51 smd: 0(0,0)
  rect 1.6x0.61 smd: 1(-2.7,1.905)
  oval 1.6x0.61 smd: 2(-2.7,0.635) 3(-2.7,-0.635) 4(-2.7,-1.905) 5(2.7,-1.905) 6(2.7,-0.653) 7(2.7,0.653) 8(2.7,1.905)
  silkscreen extent -2.39,-2.54 1.65,3.17
SOP8_M [mm] "8-Pin Small Outline Integrated Circuit 1.27 mm Pitch, IPC Low Density"
  oval 2.3x0.7 smd: 1(-2.55,1.905) 2(-2.55,0.635) 3(-2.55,-0.635) 4(-2.55,-1.905) 5(2.55,-1.905) 6(2.55,-0.635) 7(2.55,0.635) 8(2.55,1.905)
  silkscreen extent -2.67,-2.5 1,2.93, body extent -2,-2.5 2,2.5, height 1.75
SOT23-3N [mm] "SOT23, 3-Leads, Body 2.9x1.3mm, Pitch 0.95mm, Lead Span 2.5mm, IPC Medium Density"
  rect 1.5x0.6 smd: 1(-0.95,0.95) 2(-0.95,-0.95) 3(0.95,0)
  silkscreen extent -1.07,-1.5 0.7,1.92, body extent -0.7,-1.5 0.7,1.5, height 1.1
SOT223-4M [mm] "SOT223, 4-Leads, Body 6.5x3.5mm, Pitch 2.3mm, Lead Span 7mm, IPC Low Density"
  rect 2.7x1 smd: 1(-2.95,2.3) 2(-2.95,0) 3(-2.95,-2.3)
  rect 2.7x3.3 smd: 4(2.95,0)
  silkscreen extent -3.07,-3.35 1.3,3.47, body extent -1.85,-3.35 1.85,3.35, height 1.8
"TO92 variant" [mm] "TO, Flat Index;  Axial Leads; Body Dia. 4.8mm; Leads 0.51 x 0.51 mm (max)"
  oval 2x1 hole 0.9: 1(0,-1.27) 2(-1.27,0) 3(0,1.27)
  silkscreen extent -2.65,-2.65 1.55,2.65
TP1.4/1.0 [mm]
  round 1.4 hole 1: 1(0,0)
TQFP64_M [mm] "64-Pin Thin Quad Flat Pack 0.5 mm Pitch, IPC Low Density"
  oval 2.1x0.3 smd: 1(-5.6,3.75) 2(-5.6,3.25) 3(-5.6,2.75) 4(-5.6,2.25) 5(-5.6,1.75) 6(-5.6,1.25) 7(-5.6,0.75) 8(-5.6,0.25) 9(-5.6,-0.25) 10(-5.6,-0.75) 11(-5.6,-1.25) 12(-5.6,-1.75) 13(-5.6,-2.25) 14(-5.6,-2.75) 15(-5.6,-3.25) 16(-5.6,-3.75) 33(5.6,-3.75) 34(5.6,-3.25) 35(5.6,-2.75) 36(5.6,-2.25) 37(5.6,-1.75) 38(5.6,-1.25) 39(5.6,-0.75) 40(5.6,-0.25) 41(5.6,0.25) 42(5.6,0.75) 43(5.6,1.25) 44(5.6,1.75) 45(5.6,2.25) 46(5.6,2.75) 47(5.6,3.25) 48(5.6,3.75)
  oval 0.3x2.1 smd: 17(-3.75,-5.6) 18(-3.25,-5.6) 19(-2.75,-5.6) 20(-2.25,-5.6) 21(-1.75,-5.6) 22(-1.25,-5.6) 23(-0.75,-5.6) 24(-0.25,-5.6) 25(0.25,-5.6) 26(0.75,-5.6) 27(1.25,-5.6) 28(1.75,-5.6) 29(2.25,-5.6) 30(2.75,-5.6) 31(3.25,-5.6) 32(3.75,-5.6) 49(3.75,5.6) 50(3.25,5.6) 51(2.75,5.6) 52(2.25,5.6) 53(1.75,5.6) 54(1.25,5.6) 55(0.75,5.6) 56(0.25,5.6) 57(-0.25,5.6) 58(-0.75,5.6) 59(-1.25,5.6) 60(-1.75,5.6) 61(-2.25,5.6) 62(-2.75,5.6) 63(-3.25,5.6) 64(-3.75,5.6)
  silkscreen extent -5.72,-4.15 4.15,4.57, body extent -5,-5 5,5, height 1.6
UU9.8/UF9.8 [mm] "Balum"
  round 1.4 hole 0.8: 1(-3.5,4) 2(3.5,4) 3(-3.5,-4) 4(3.5,-4)
  silkscreen extent -5.5,-8 5.5,8, body extent -5.64,-8.15 5.61,8.15, height 16

## Part data
C1 C2 C3 C4 C5 C6 C7 C8 C9 C14 C15 C16 C21 C22 C24 C25 C33 C34 C41 C44 C45: library part CAP, "Capacitor"
C10 C11 C12 C13 C17 C18 C19 C20 C23 C26 C27 C28 C29 C35 C36 C40: library part CAP
C30 C32: library part "Cap Semi", "Ceramic Capactor"
C31: library part "Cap Semi", "Capactor"
C37: library part "Cap Semi", "Capacitor"
C38 C39 C42 C43 C46: library part "Cap Pol1", "Polarized Capacitor (Radial)"
D1 D2 D31: library part PESD3V3S2UT, "ESD protection diode 3.3V"
D3 D4 D22: library part ZENER2, "Zener Diode"
D5: library part DIODE, "Zener Diode 3A 40V"
D6 D8 D14 D15 D16 D17 D18 D19 D20 D21 D25 D26 D29 D30: "Typical RED, GREEN, YELLOW, AMBER GaAs LED"
D7 D9: library part "Zener unidirectional", "Zener diode"
D10: library part "Zener bidirectional", "Bidirectional zener diode"
D11: library part LED0, "Typical INFRARED GaAs LED"
D12: library part "Photo Sen", "Photosensitive Diode"
D13 D23 D24 D27 D28: library part DIODE, "Diode"
D32: library part "D Zener", "Zener Diode"
DS1: library part BUZZER, "HXD 5VDC dia12 h10"
F1: library part FUSE1, "Fuse socket w/ cover"
H1 H2 H3 H4 H5: library part SCRE_HOLE_3.2, "Screw hole for M3.0"
IR_PULSE: library part TP1.4/1.0
J1: library part JUMPER, "Jumper 2.54-2"
J5 J6 J7 J8: library part JP2-2.54
L1: library part INDUCTOR, "Inductor 3A"
L2: library part INDUCTOR, "Radial type Inductor 2A"
N1: library part NTC, "Thermister"
P1 P2 P3: library part "Header 2", "CT connector"
P4: library part "Header 2", "Connector 2-Pin"
P5: library part "Header 13X2", "IDC2.54-13x2 Header"
P6: library part SWD-Connector, "SW debug connector"
P7: library part "Header 2", "Header, 2-Pin"
P8 P9 P10 P11 P12: library part "Header 2"
Q1: library part MMBT3904, "NPN transistor"
Q2 Q4 Q5 Q6 Q7 Q8: library part NPN, "NPN transistor"
Q3 Q10: library part MMBT3906, "PNP transitor"
Q9: library part MOSFET-P, "P-Channel MOSFET"
R1 R2 R17 R18 R19 R20 R21 R22 R23 R24 R25 R26 R27 R28 R29 R30 R31 R32 R33 R39 R40 R41 R42 R43 R44 R45 R47 R48 R49 R50 R51 R52 R53 R54 R55 R56 R57 R58 R59 R60 R64: library part Res3, "Resistor"
R3: library part RES1, "Resistor"
R4 R5 R6 R7 R8 R9 R10 R11 R12 R13 R14 R15 R16 R34 R35 R36 R37 R38 R46 R61 R62 R63: library part RES1
RV1 RV2 RV3 RV4: library part "Res Varistor", "Varistor (Voltage-Sensitive Resistor)"
T4: library part "Balum UU9.8/UF9.8", "Balum"
U1: library part ST24E64B6(8), "Serial Extended Addressing Compatible With I2C Bus 64K(8K x 8) EEPROM"
U2: library part STM32F105XX, "ST Cortex M3 MCU 64 pins"
U3: "3A 1.5MHz, 28V step down converter"
U4: library part VOLTREG, "ST Low drop voltage regulator"
U5: library part B0505S-1W, "12V isolated DC-DC converter"
U6: library part LM258D, "Dual Operational Amplifier"
U7: library part LM393D, "Dual Differential Comparator"
U8: library part RFID-M1, "RFID module"
U9: "Digital Temperature sensor"
U10: library part LM6029A, "Topway LCD module 3.3V"
U11: library part HIECUBE_AC-DC_24W, "HICUBE AC/DC 24W 12V"
W1 W2 W3 W4: "Hongfa power relay 40A"
X1: library part CRYSTAL, "Crystal"
Y1 Y2 Y3 Y4 Y5 Y6 Y7 Y8: library part DSS6, "Murata EMI suppression filter"

## Free pads (board coordinates)
  round 5 hole 3.6: 0(36.373,207.391)

## Via types
v1: diameter 0.8, hole 0.5, Top Layer to Bottom Layer, 150 vias
v2: diameter 0.8, hole 0.6, Top Layer to Bottom Layer, 80 vias
v3: diameter 0.5, hole 0.3, Top Layer to Bottom Layer, 53 vias
v4: diameter 1.27, hole 0.711, Top Layer to Bottom Layer, 20 vias
v5: diameter 1.2, hole 0.7, Top Layer to Bottom Layer, 13 vias
v6: diameter 1.2, hole 0.8, Top Layer to Bottom Layer, 4 vias

## Nets (pads, with @x,y where several pads share a name; then routed paths per layer and width w, separated by ;. In a path a pad name is that pad's centre, name@x,y a point inside that pad or via, vN(x,y) a via of type N, cw(c..) or ccw(c..) an arc to the next point about the centre after c; other vN are vias at no path point)
+3V3: 3V3.1 C1.1 C2.1 C3.1 C4.1 C5.1 C6.1 C7.1 C21.1 C33.2 C37.2 C39.1 C40.1 C41.1 D3.2 P5.7 P5.8 P5.9 P5.10 P6.6 Q9.3 Q10.2 R1.2 R2.2 R26.2 R30.1 R34.2 R35.2 R37.1 R39.2 R45.2 U1.8 U2.19 U2.32 U2.48 U2.64 U7.8 U9.3 U10.2 Y2.1 Y8.1 | length 785
  Top Layer w0.254: v1@93.13,194.882 C40.1@93.13,202.184 ; R1.2@109.294,142.431 109.474,142.431 111.506,142.431 112.194,142.431 112.374,142.251 ; 112.373,142.251 ccw(c111.964,141.842) 111.583,142.277 cw(c111.964,141.842) 112.373,142.251 ; C40.1@92.668,201.564 cw(c91.553,200.449) 93.13,200.449 ccw(c91.553,200.449) C40.1@92.668,201.564 ; v1@92.847,194.986 ccw(c92.164,195.669) 93.13,195.669 cw(c92.164,195.669) v1@92.847,194.986 ; C40.1@92.848,201.744 cw(c92.166,201.062) 93.13,201.062 ccw(c92.166,201.062) C40.1@92.848,201.744 ; 93.13,195.235 ccw(c93.482,195.235) 93.233,194.986 cw(c93.482,195.235) 93.13,195.235 ; 93.13,200.893 cw(c94.079,200.893) 93.408,201.564 ccw(c94.079,200.893) 93.13,200.893 ; R1.2@109.729,142.096 cw(c110.537,141.288) 110.537,142.431 ccw(c110.537,141.288) R1.2@109.729,142.096 ; R1.2@109.83,142.431 cw(c109.83,140.675) 111.072,141.917 ccw(c109.83,140.675) R1.2@109.83,142.431 ; R1.2@109.908,141.917 cw(c111.15,140.675) 111.15,142.431 ccw(c111.15,140.675) R1.2@109.908,141.917 ; R1.2@109.908,142.585 ccw(c110.282,142.959) 110.282,142.431 cw(c110.282,142.959) R1.2@109.908,142.585 ; 110.443,142.431 cw(c110.443,141.288) 111.251,142.096 ccw(c110.443,141.288) 110.443,142.431 ; 110.698,142.431 ccw(c110.698,142.959) 111.072,142.585 cw(c110.698,142.959) 110.698,142.431 ; R2.2@111.416,142.468 cw(c111.785,142.047) 112.182,142.443 ccw(c111.785,142.047) R2.2@111.416,142.468
  Top Layer w0.3: C5.1@84.494,161.544 C4.1@84.494,159.004 84.494,158.127 ; U2.64@86.484,155.132 86.484,156.137 84.494,158.127 ; C7.1@87.274,137.224 C7.1@87.274,137.605 C6.1@87.274,139.764 87.484,139.974 U2.19@87.484,143.932 ; U2.32@93.984,143.932 95.91,142.006 C2.1@95.91,139.967 ; U2.48@95.834,153.282 97.568,153.282 C3.1@99.226,154.94 ; R39.2@114.26,150.266 114.26,152.629 C37.2@114.21,152.679 116.154,152.679 U9.3@117.424,151.409 ; C4.1@84.287,158.449 cw(c84.14,158.127) 84.494,158.127 ; C4.1@84.287,158.449 cw(c84.14,158.127) 84.494,158.127 ; C4.1@84.287,158.449 cw(c84.14,158.127) 84.494,158.127 ; C4.1@84.287,158.449 cw(c84.14,158.127) 84.494,158.127 ; 84.494,158.127 cw(c84.848,158.127) C4.1@84.701,158.449 ; 84.494,158.127 cw(c84.848,158.127) C4.1@84.701,158.449 ; 84.494,158.127 cw(c84.848,158.127) C4.1@84.701,158.449 ; 84.494,158.127 cw(c84.848,158.127) C4.1@84.701,158.449 ; 84.494,160.237 cw(c85.701,160.237) 84.848,161.09 ccw(c85.701,160.237) 84.494,160.237 ; 84.494,160.237 ccw(c83.287,160.237) 84.14,161.09 cw(c83.287,160.237) 84.494,160.237 ; 84.494,160.311 cw(c83.287,160.311) 84.14,159.458 ccw(c83.287,160.311) 84.494,160.311 ; 84.494,160.311 ccw(c85.701,160.311) 84.848,159.458 cw(c85.701,160.311) 84.494,160.311 ; 87.274,138.457 cw(c88.481,138.457) 87.628,139.31 ccw(c88.481,138.457) 87.274,138.457 ; 87.274,138.457 ccw(c86.067,138.457) 86.92,139.31 cw(c86.067,138.457) 87.274,138.457 ; 87.274,138.912 cw(c86.067,138.912) 86.92,138.059 ccw(c86.067,138.912) 87.274,138.912 ; 87.274,138.912 ccw(c88.481,138.912) 87.628,138.059 cw(c88.481,138.912) 87.274,138.912 ; 95.91,141.274 cw(c94.703,141.274) 95.556,140.421 ccw(c94.703,141.274) 95.91,141.274 ; 95.91,141.274 ccw(c97.117,141.274) 96.264,140.421 cw(c97.117,141.274) 95.91,141.274 ; 114.26,151.453 cw(c113.174,151.453) 113.942,150.685 ccw(c113.174,151.453) 114.26,151.453 ; 114.26,151.453 ccw(c115.347,151.453) 114.578,150.685 cw(c115.347,151.453) 114.26,151.453 ; 115.417,152.679 cw(c115.417,153.887) 114.564,153.033 ccw(c115.417,153.887) 115.417,152.679 ; 115.417,152.679 ccw(c115.417,151.472) 114.564,152.326 cw(c115.417,151.472) 115.417,152.679 ; C4.1@84.394,158.904 ccw(c86.029,158.904) 84.873,157.748 cw(c86.029,158.904) C4.1@84.394,158.904 ; C4.1@84.694,158.904 ccw(c87.053,158.904) 85.385,157.236 cw(c87.053,158.904) C4.1@84.694,158.904 ; C4.1@84.994,158.904 ccw(c88.077,158.904) 85.897,156.724 cw(c88.077,158.904) C4.1@84.994,158.904 ; 86.41,156.211 cw(c86.231,156.032) 86.484,156.032 ccw(c86.231,156.032) 86.41,156.211 ; C6.1@86.92,140.218 ccw(c85.56,141.578) 87.484,141.578 cw(c85.56,141.578) C6.1@86.92,140.218 ; C6.1@87.133,140.005 ccw(c86.284,140.854) 87.484,140.854 cw(c86.284,140.854) C6.1@87.133,140.005 ; 87.484,140.564 ccw(c87.974,140.564) 87.628,140.218 cw(c87.974,140.564) 87.484,140.564 ; U2.32@93.984,143.032 cw(c93.984,140.859) 95.52,142.396 ccw(c93.984,140.859) U2.32@93.984,143.032 ; U2.32@93.984,143.332 cw(c93.984,141.884) 95.008,142.908 ccw(c93.984,141.884) U2.32@93.984,143.332 ; U2.32@93.984,143.632 cw(c93.984,142.908) 94.496,143.42 ccw(c93.984,142.908) U2.32@93.984,143.632 ; 98.202,153.916 cw(c99.226,152.891) 99.226,154.34 ccw(c99.226,152.891) 98.202,153.916 ; 98.443,154.157 ccw(c97.76,154.84) 98.726,154.84 cw(c97.76,154.84) 98.443,154.157 ; C3.1@98.714,154.428 cw(c99.226,153.916) 99.226,154.64 ccw(c99.226,153.916) C3.1@98.714,154.428 ; C37.2@113.857,152.226 cw(c112.882,151.251) 114.26,151.251 ccw(c112.882,151.251) C37.2@113.857,152.226 ; 114.26,151.493 cw(c115.296,151.493) 114.564,152.226 ccw(c115.296,151.493) 114.26,151.493 ; 116.404,152.429 ccw(c117.001,153.026) 117.3,152.237 cw(c117.001,153.026) 116.404,152.429 ; 116.733,152.101 ccw(c117.182,152.55) 117.406,151.956 cw(c117.182,152.55) 116.733,152.101
  Top Layer w0.5: v1@20.536,147.828 21.488,146.875 R30.1@21.706,146.875 ; R26.2@37.031,142.303 R26.2@37.223,142.303 ; 56.046,135.116 56.288,134.874 ; C21.1@56.046,143.764 56.046,145.439 Y2.1@57.483,146.876 ; Q10.2@58.037,202.963 60.096,200.904 v6(60.096,194.818) ; v6@72.02,194.832 R45.2@72.02,204.724 ; U10.2@92.565,208.503 92.565,205.289 C41.1@93.13,204.724 C40.1@93.13,202.184 ; C2.1@95.91,139.967 v1@97.244,139.967 ; 56.046,144.83 cw(c55.08,144.83) 55.763,144.147 ccw(c55.08,144.83) 56.046,144.83 ; 56.046,144.83 ccw(c57.012,144.83) 56.329,144.147 cw(c57.012,144.83) 56.046,144.83 ; 56.609,146.002 cw(c57.483,145.128) 57.483,146.364 ccw(c57.483,145.128) 56.609,146.002 ; 56.609,146.002 ccw(c55.735,146.876) 56.971,146.876 cw(c55.735,146.876) 56.609,146.002 ; 60.096,195.663 cw(c59.251,195.663) 59.849,195.065 ccw(c59.251,195.663) 60.096,195.663 ; 60.096,195.663 ccw(c60.941,195.663) 60.344,195.065 cw(c60.941,195.663) 60.096,195.663 ; 72.02,203.779 cw(c72.865,203.779) 72.268,204.377 ccw(c72.865,203.779) 72.02,203.779 ; 72.02,203.779 ccw(c71.175,203.779) 71.773,204.377 cw(c71.175,203.779) 72.02,203.779 ; 92.565,207.296 cw(c93.772,207.296) 92.919,208.15 ccw(c93.772,207.296) 92.565,207.296 ; 92.565,207.296 ccw(c91.358,207.296) 92.211,208.15 cw(c91.358,207.296) 92.565,207.296 ; 93.13,203.658 cw(c94.096,203.658) 93.413,204.341 ccw(c94.096,203.658) 93.13,203.658 ; 93.13,203.658 ccw(c92.164,203.658) 92.847,204.341 cw(c92.164,203.658) 93.13,203.658 ; 96.876,139.967 cw(c96.876,140.933) 96.193,140.25 ccw(c96.876,140.933) 96.876,139.967 ; 96.876,139.967 ccw(c96.876,139.001) 96.193,139.684 cw(c96.876,139.001) 96.876,139.967 ; v1@20.32,147.678 cw(c20.32,146.795) 20.945,147.419 ccw(c20.32,146.795) v1@20.32,147.678 ; 20.695,147.669 ccw(c21.545,148.519) 21.67,147.324 cw(c21.545,148.519) 20.695,147.669 ; Q10.2@58.037,202.463 cw(c58.037,201.256) 58.891,202.109 ccw(c58.037,201.256) Q10.2@58.037,202.463 ; v6@71.787,195.065 ccw(c71.224,195.628) 72.02,195.628 cw(c71.224,195.628) v6@71.787,195.065 ; 72.02,195.698 ccw(c72.914,195.698) 72.282,195.065 cw(c72.914,195.698) 72.02,195.698 ; 92.565,205.947 ccw(c94.253,205.947) 93.059,204.753 cw(c94.253,205.947) 92.565,205.947 ; 92.565,207.154 ccw(c95.46,207.154) 93.413,205.107 cw(c95.46,207.154) 92.565,207.154 ; C40.1@92.755,202.717 ccw(c91.85,203.622) 93.13,203.622 cw(c91.85,203.622) C40.1@92.755,202.717 ; 93.13,203.178 ccw(c93.782,203.178) 93.321,202.717 cw(c93.782,203.178) 93.13,203.178 ; 96.829,139.967 ccw(c96.829,140.458) 97.176,140.111 cw(c96.829,140.458) 96.829,139.967
  Top Layer w0.6: C1.1@106.514,144.78 106.514,142.445 U1.8@106.5,142.431 R1.2@109.294,142.431 ; R1.2@109.474,142.251 R2.2@111.506,142.251 112.374,142.251 112.917,142.251 113.69,141.478 113.69,135.077 ; U7.8@136.955,161.978 139.993,161.978 R37.1@142.533,161.978 ; R37.1@142.533,161.964 R34.2@144.602,161.964 R34.2@144.588,161.978 ; 106.514,143.835 cw(c107.359,143.835) 106.761,144.433 ccw(c107.359,143.835) 106.514,143.835 ; 106.514,143.835 ccw(c105.669,143.835) 106.266,144.433 cw(c105.669,143.835) 106.514,143.835 ; 110.298,142.251 cw(c110.298,142.975) 109.786,142.463 ccw(c110.298,142.975) 110.298,142.251 ; 110.298,142.251 ccw(c110.298,141.527) 109.786,142.039 cw(c110.298,141.527) 110.298,142.251 ; 110.682,142.251 cw(c110.682,141.527) 111.194,142.039 ccw(c110.682,141.527) 110.682,142.251 ; 110.682,142.251 ccw(c110.682,142.975) 111.194,142.463 cw(c110.682,142.975) 110.682,142.251 ; R2.2@111.818,142.039 cw(c112.33,141.527) 112.33,142.251 ; R2.2@111.818,142.039 cw(c112.33,141.527) 112.33,142.251 ; R2.2@111.818,142.039 cw(c112.33,141.527) 112.33,142.251 ; R2.2@111.818,142.039 cw(c112.33,141.527) 112.33,142.251 ; R2.2@111.818,142.039 cw(c112.33,141.527) 112.33,142.251 ; R2.2@111.818,142.039 cw(c112.33,141.527) 112.33,142.251 ; R2.2@111.818,142.463 ccw(c112.33,142.975) 112.33,142.251 ; R2.2@111.818,142.463 ccw(c112.33,142.975) 112.33,142.251 ; R2.2@111.818,142.463 ccw(c112.33,142.975) 112.33,142.251 ; R2.2@111.818,142.463 ccw(c112.33,142.975) 112.33,142.251 ; R2.2@111.818,142.463 ccw(c112.33,142.975) 112.33,142.251 ; R2.2@111.818,142.463 ccw(c112.33,142.975) 112.33,142.251 ; 143.357,161.964 cw(c143.357,162.688) 142.845,162.176 ccw(c143.357,162.688) 143.357,161.964 ; 143.357,161.964 ccw(c143.357,161.239) 142.845,161.752 cw(c143.357,161.239) 143.357,161.964 ; 143.778,161.964 cw(c143.778,161.239) 144.29,161.752 ccw(c143.778,161.239) 143.778,161.964 ; 143.778,161.964 ccw(c143.778,162.688) 144.29,162.176 cw(c143.778,162.688) 143.778,161.964 ; 108.215,142.431 cw(c108.215,141.092) 109.162,142.039 ccw(c108.215,141.092) 108.215,142.431 ; 138.892,161.978 cw(c138.892,160.913) 139.645,161.666 ccw(c138.892,160.913) 138.892,161.978 ; 139.203,161.978 ccw(c139.203,162.603) 139.645,162.161 cw(c139.203,162.603) 139.203,161.978 ; C33.2@140.34,161.666 cw(c141.093,160.913) 141.093,161.978 ccw(c141.093,160.913) C33.2@140.34,161.666 ; C33.2@140.34,162.161 ccw(c140.782,162.603) 140.782,161.978 cw(c140.782,162.603) C33.2@140.34,162.161 ; 141.674,161.978 cw(c141.674,161.205) 142.22,161.752 ccw(c141.674,161.205) 141.674,161.978 ; 141.743,161.978 ccw(c141.743,162.653) 142.22,162.176 cw(c141.743,162.653) 141.743,161.978
  Top Layer w0.8: C5.1@84.494,161.544 v1(84.494,194.754)
  Top Layer w1: R26.2@37.031,142.303 38.329,142.303 39.129,142.303 46.685,134.747 ; Y2.1@57.483,146.876 55.359,146.876 53.899,148.336 53.899,157.277 72.034,175.412 v6(72.034,194.818) ; 87.274,135.102 C7.1@87.274,137.605 ; C3.1@99.226,154.94 99.226,158.635 97.993,159.868 97.993,186.207 v4(106.578,194.793) ; 111.735,167.64 111.735,159.512 v1(114.148,157.099) ; 123.012,161.95 R35.2@127.345,161.95 ; P6.6@128.969,111.951 128.969,117.437 136.07,124.538 P5.7@137.478,124.538 ; P5.9@137.478,121.998 P5.7@137.478,124.538 ; P5.10@140.018,121.998 P5.8@140.018,124.538 ; v1(142.342,169.85) 142.533,169.659 142.533,161.978 R37.1@142.533,161.964 ; C39.1@146.812,124.444 146.718,124.538 P5.8@140.018,124.538 ; 128.969,112.917 cw(c128.003,112.917) 128.686,112.234 ccw(c128.003,112.917) 128.969,112.917 ; 128.969,112.917 ccw(c129.935,112.917) 129.252,112.234 cw(c129.935,112.917) 128.969,112.917 ; P5.7@137.478,124.538 P5.8@140.018,124.538 ; v1@38.322,142.34 cw(c38.422,140.733) 39.561,141.871 ccw(c38.422,140.733) v1@38.322,142.34 ; v1@38.329,142.34 cw(c38.329,140.497) 39.632,141.8 ccw(c38.329,140.497) v1@38.329,142.34
  Top Layer w2: 46.685,134.747 99.212,134.747 103.556,134.747 v1(142.9,134.747) ; v4(106.578,194.793) 108.229,193.142 108.229,171.145 111.735,167.64 121.336,167.64
  Bottom Layer w0.254: U9.3@117.388,151.373 117.388,151.409 U9.3@117.388,151.446
  Bottom Layer w0.5: v1(20.32,147.828) 25.908,142.24 v1(38.329,142.24) ; v1(97.282,140.005) 98.323,140.005 103.556,134.772 v1(103.556,134.722) ; 103.264,135.064 cw(c102.921,134.722) 103.406,134.722 ccw(c102.921,134.722) 103.264,135.064
  Bottom Layer w1: v1(114.148,157.099) 117.388,153.859 117.388,151.446 U9.3@117.424,151.409 U9.3@117.388,151.373
  Bottom Layer w1.5: Y8.1@91.672,114.275 91.672,118.292 99.212,125.832 v5(99.212,134.696)
  Bottom Layer w2: v6@60.198,194.793 72.034,194.793 84.494,194.793 v1(93.04,194.793) v4(106.578,194.793) ; P5.8@140.018,124.538 142.215,124.538 ; v1@142.9,135.077 v1(142.9,134.747) 142.9,125.224 142.215,124.538 ; C39.1@146.718,124.538 142.215,124.538
  Bottom Layer w2.5: 122.911,169.672 142.342,169.672 142.672,169.672 147.955,164.389 147.955,142.316 142.9,137.262 v1@142.9,135.077
  other v4: 121.234,171.933 123.622,171.958
+5V: C38.1 C46.1 D4.2 D13.2 DS1.1 J2.2 P5.1 P5.2 P5.3 P5.4 P5.5 P5.6 R10.2 R41.1 R42.1 R43.1 R44.1 Y1.1 | length 423.8
  Top Layer w0.254: 81.396,132.806 109.868,132.806
  Top Layer w0.5: R10.2@39.243,188.987 39.243,192.659 ; 51.333,132.563 51.424,132.472 R43.1@51.424,130.556 ; R42.1@81.396,130.556 81.396,132.563 81.396,132.806 ; 111.052,132.563 111.368,132.247 R41.1@111.368,130.556 ; 39.243,189.832 cw(c38.398,189.832) 38.996,189.235 ccw(c38.398,189.832) 39.243,189.832 ; 39.243,189.832 ccw(c40.088,189.832) 39.49,189.235 cw(c40.088,189.832) 39.243,189.832 ; 51.424,131.501 cw(c50.579,131.501) 51.177,130.903 ccw(c50.579,131.501) 51.424,131.501 ; 51.424,131.501 ccw(c52.269,131.501) 51.672,130.903 cw(c52.269,131.501) 51.424,131.501 ; 81.396,131.501 cw(c80.551,131.501) 81.149,130.903 ccw(c80.551,131.501) 81.396,131.501 ; 81.396,131.501 ccw(c82.241,131.501) 81.644,130.903 cw(c82.241,131.501) 81.396,131.501 ; 111.368,131.501 cw(c110.523,131.501) 111.121,130.903 ccw(c110.523,131.501) 111.368,131.501 ; 111.368,131.501 ccw(c112.213,131.501) 111.616,130.903 cw(c112.213,131.501) 111.368,131.501
  Top Layer w1: R44.1@25.284,135.128 27.519,132.893 28.931,132.893 ; 27.965,132.893 28.931,132.893 ; DS1.1@114.502,193.167 114.502,197.918 C46.1@112.776,199.644 113.792,200.66 D13.2@118.621,200.66 ; P5.5@137.478,127.078 P5.3@137.478,129.618 P5.1@137.478,132.158 137.073,132.563 111.052,132.563 81.396,132.563 51.333,132.563 29.261,132.563 28.931,132.893 ; P5.6@140.018,127.078 P5.4@140.018,129.618 P5.2@140.018,132.158 ; 114.502,194.133 cw(c113.536,194.133) 114.219,193.45 ccw(c113.536,194.133) 114.502,194.133 ; 114.502,194.133 ccw(c115.468,194.133) 114.785,193.45 cw(c115.468,194.133) 114.502,194.133 ; C46.1@112.9,199.52 cw(c115.651,196.769) 115.651,200.66 ccw(c115.651,196.769) C46.1@112.9,199.52 ; 135.717,132.563 cw(c135.717,130.397) 137.248,131.928 ccw(c135.717,130.397) 135.717,132.563
  Top Layer w1.5: v1@38.329,193.015 40.132,193.015 ; P5.1@137.478,132.158 P5.2@140.018,132.158 C38.1@146.804,132.158
  Top Layer w1.6: C38.1@146.804,132.158 C38.1@146.812,132.166 151.917,137.271
  Top Layer w2: Y1.1@116.015,184.544 116.015,188.683 ; 119.228,190.627 146.837,190.627 151.917,185.547 151.917,137.271 ; v4@114.781,189.446 cw(c114.135,187.68) 116.015,187.68 ccw(c114.135,187.68) v4@114.781,189.446 ; v4@114.914,189.361 cw(c112.255,186.702) 116.015,186.702 ccw(c112.255,186.702) v4@114.914,189.361 ; v4@118.97,191.156 ccw(c120.247,192.434) 120.247,190.627 cw(c120.247,192.434) v4@118.97,191.156
  Bottom Layer w2: 41.694,193.586 42.227,193.053
  Bottom Layer w3: 41.935,192.761 43.917,190.779 v4(116.332,190.779) ; v4(116.332,190.779) ccw(c116.332,187.777) 113.977,189.64 cw(c116.332,187.777) v4(116.332,190.779) ; v4(116.332,190.779) cw(c116.332,193.21) 113.902,193.153 ccw(c116.332,193.21) v4(116.332,190.779) ; 110.186,190.779 ccw(c110.186,197.483) 114.926,192.743 cw(c110.186,197.483) 110.186,190.779 ; 112.697,190.779 cw(c112.697,187.144) 115.267,189.715 ccw(c112.697,187.144) 112.697,190.779
  other v1: 38.659,192.989 40.831,192.989 43.002,192.989 38.659,194.742 40.831,194.742 43.002,194.742
  other v4: 118.415,189.001 114.656,189.103 119.228,191.414 117.297,193.116